# EAGLE board Schemat termometru sWERSJA KOLEJNAAAAA DOSKONALA 4 (EAGLE 9.4.1)
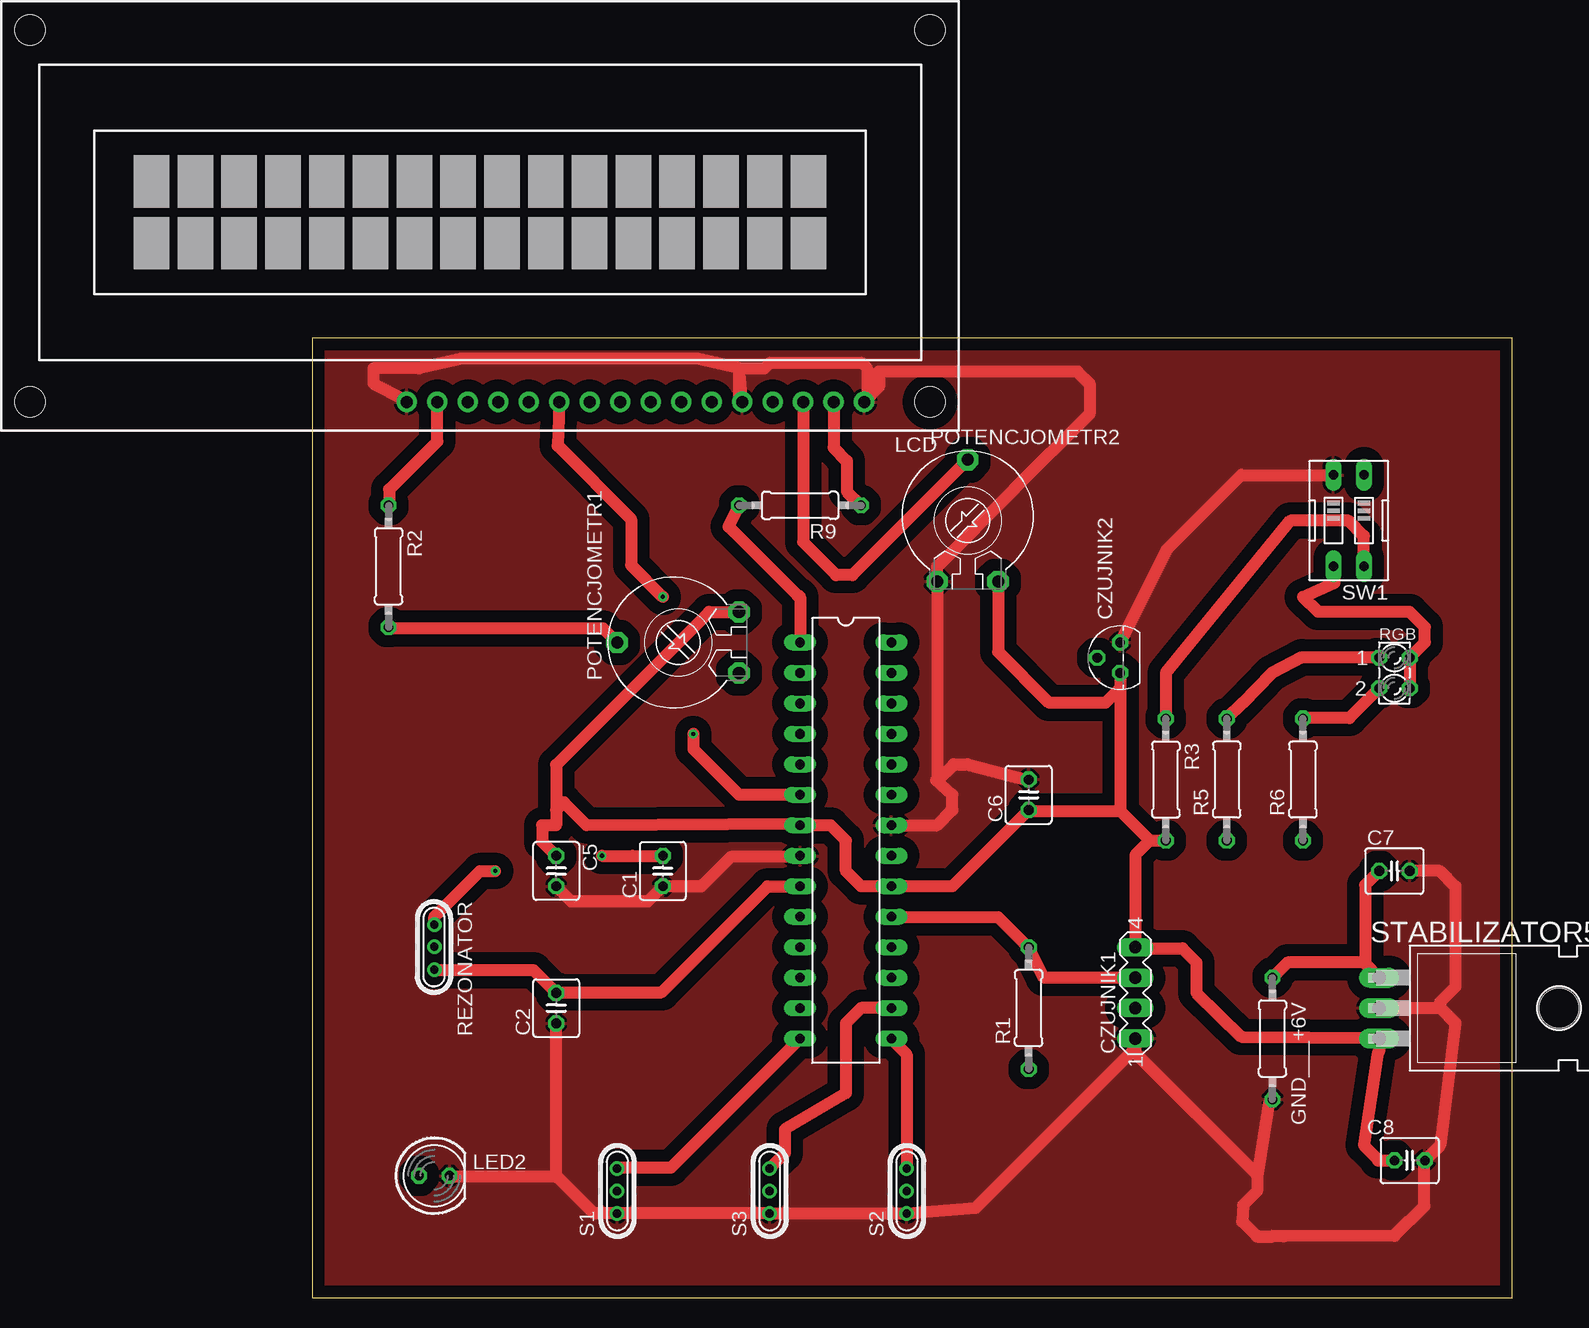
[diagram p0: board, top side]
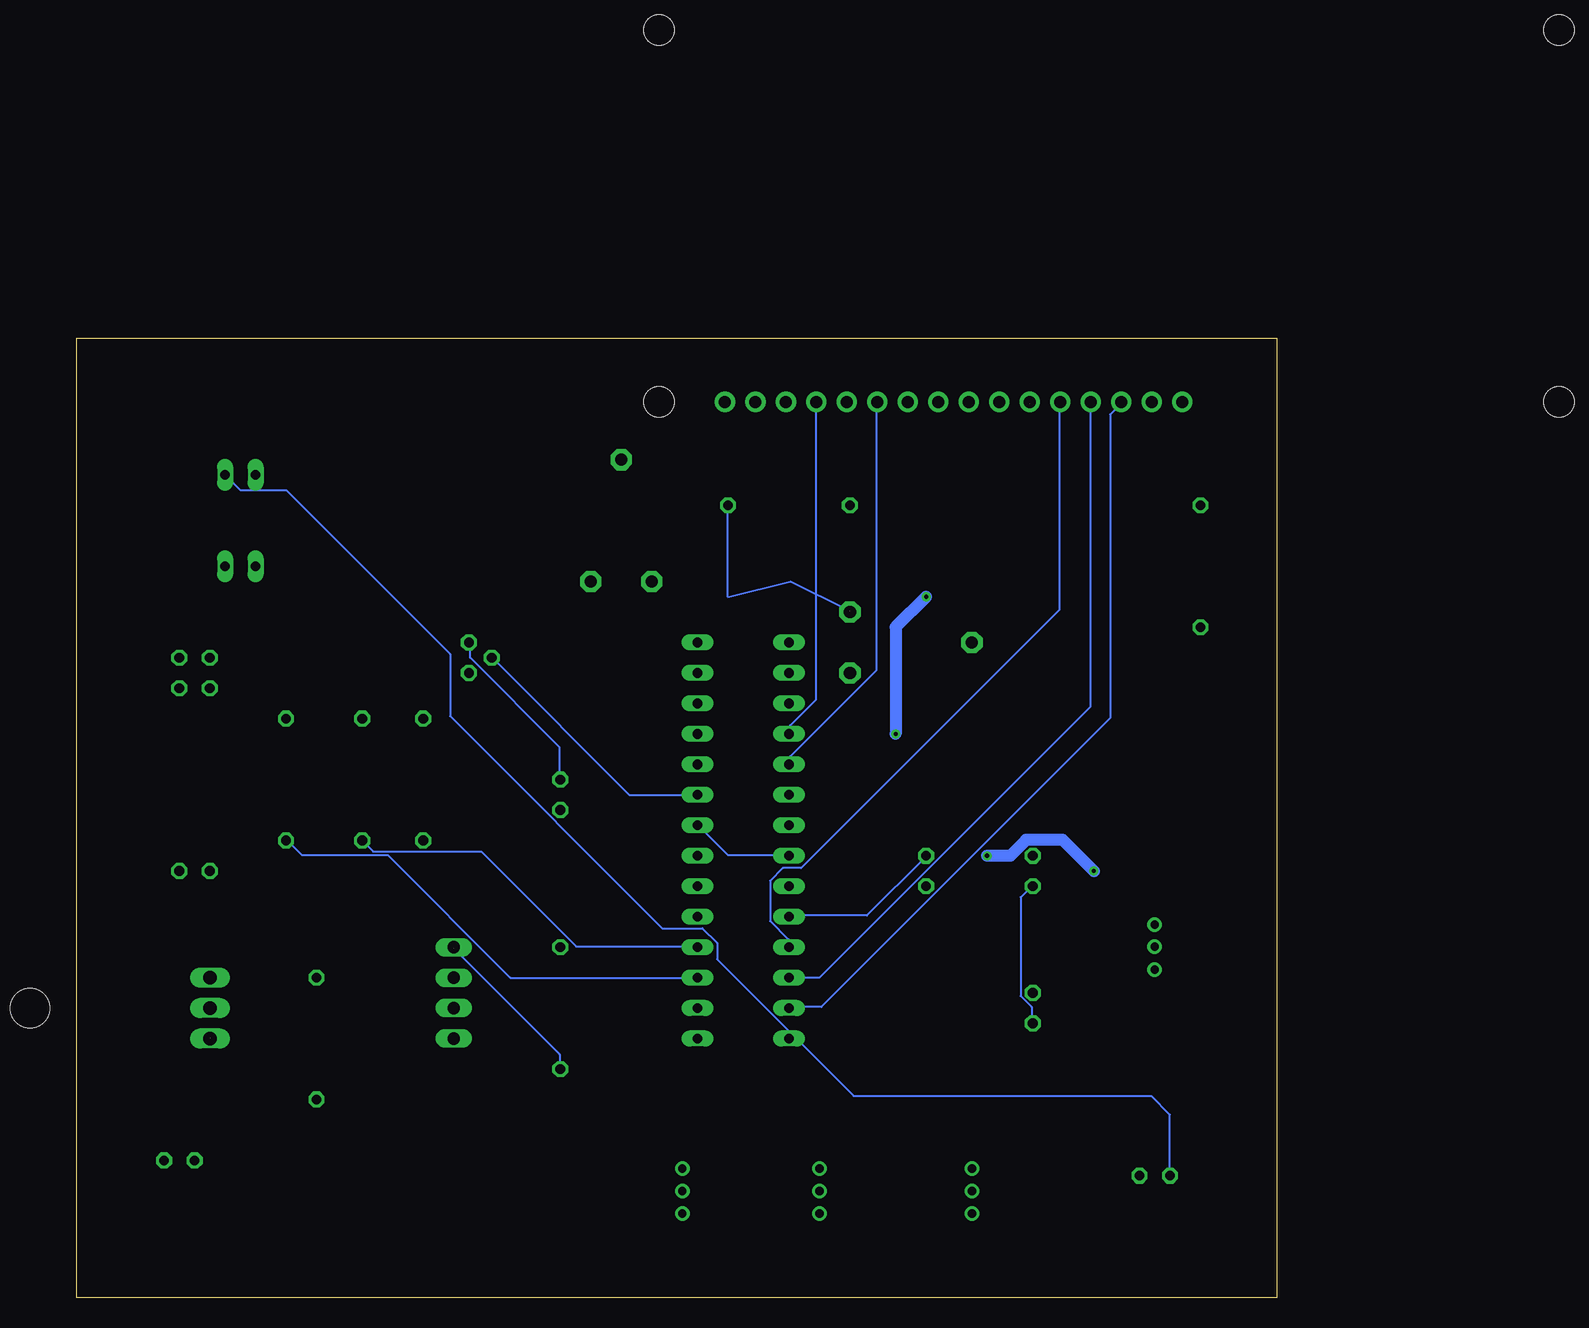
[diagram p1: board, bottom side, seen from below]

Size 100 x 80 mm. Coordinates in mm from the lower left corner, seen from the top.
Outline: 0,0 100,0 100,80 0,80 0,0
Copper layers (1*16): Top 0.035mm / dielectric 1.5mm / Bottom 0.035mm
Design rules "default": minimum track width 6mil, minimum drill 0.35mm, track to track 6mil, track to pad 6mil, pad to pad 6mil, via to via 6mil, smd to smd 6mil, copper to edge 40mil, drill to drill 6mil, minimum pad ring 10mil, minimum via ring 8mil, stop-mask expansion 4mil, vias tented up to drill 0mil, thermal gap 10mil

## Footprints (pad centres in the part's own frame; a part is rotated, then mirrored left to right if it is on the bottom)
C025-040X050 = drill 0.813 octagon: 1 -1.27,0; 2 1.27,0
MA04-1 = drill 1.016 long: 1 -3.81,0; 2 -1.27,0; 3 1.27,0; 4 3.81,0
TO92 = drill 0.813 octagon: 1 1.27,0; 2 0,1.905; 3 -1.27,0
0207/10 = drill 0.813 octagon: 1 -5.08,0; 2 5.08,0
DIL28-3 = drill 0.813 long: 1 -16.51,-3.81; 2 -13.97,-3.81; 3 -11.43,-3.81; 4 -8.89,-3.81; 5 -6.35,-3.81; 6 -3.81,-3.81; 7 -1.27,-3.81; 8 1.27,-3.81; 9 3.81,-3.81; 10 6.35,-3.81; 11 8.89,-3.81; 12 11.43,-3.81; 13 13.97,-3.81; 14 16.51,-3.81; 15 16.51,3.81; 16 13.97,3.81; 17 11.43,3.81; 18 8.89,3.81; 19 6.35,3.81; 20 3.81,3.81; 21 1.27,3.81; 22 -1.27,3.81; 23 -3.81,3.81; 24 -6.35,3.81; 25 -8.89,3.81; 26 -11.43,3.81; 27 -13.97,3.81; 28 -16.51,3.81
TUXGR_16X2_R2 = drill 1 pad 1.676: 1 -32,15.5; 2 -29.46,15.5; 3 -26.92,15.5; 4 -24.38,15.5; 5 -21.84,15.5; 6 -19.3,15.5; 7 -16.76,15.5; 8 -14.22,15.5; 9 -11.68,15.5; 10 -9.14,15.5; 11 -6.6,15.5; 12 -4.06,15.5; 13 -1.52,15.5; 14 1.02,15.5; 15 3.56,15.5; 16 6.1,15.5 | hole 2.5: -37.5,-15.5; 37.5,-15.5; -37.5,15.5; 37.5,15.5
LED5MM = drill 0.813 octagon: A -1.27,0; K 1.27,0
PT-10 = drill 1.016 pad 1.778 octagon: 1 -2.54,-5.08; 2 2.54,-5.08; 3 0,5.08
UM1 = drill 0.7 pad 1.2: 1 -1.875,0; 2 -0.027,0; 3 1.875,0
LZR182 = drill 0.813 octagon: A1 -1.27,1.27; A2 -1.27,-1.27; K1 1.27,1.27; K2 1.27,-1.27
TO220H = drill 1.118 long: 1 -2.54,-10.16; 2 0,-10.16; 3 2.54,-10.16 | hole 3.302: 0,4.826
EDG-02 = drill 0.813 long: 1 -1.27,-3.81; 2 1.27,-3.81; 3 1.27,3.81; 4 -1.27,3.81

## Placement (x,y rotation side)
C1  [C025-040X050]  29.21,35.56 90 top
C2  [C025-040X050]  20.32,24.13 90 top
C5  [C025-040X050]  20.32,35.56 270 top
C6  [C025-040X050]  59.69,41.91 90 top
C7  [C025-040X050]  90.17,35.56 0 top
C8  [C025-040X050]  91.44,11.43 0 top
CZUJNIK1  [MA04-1]  68.58,25.4 90 top
CZUJNIK2  BC238  [TO92]  67.31,53.34 90 top
GND___+6V  [0207/10]  80.01,21.59 270 top
IC1  MEGA8-P  [DIL28-3]  44.45,38.1 270 top
LCD  TUXGR_16X2_R2  [TUXGR_16X2_R2]  13.97,90.17 180 top
LED2  [LED5MM]  10.16,10.16 0 top
POTENCJOMETR1  [PT-10]  30.48,54.61 90 top
POTENCJOMETR2  [PT-10]  54.61,64.77 0 top
R1  [0207/10]  59.69,24.13 90 top
R2  [0207/10]  6.35,60.96 270 top
R3  [0207/10]  71.12,43.18 270 top
R5  [0207/10]  76.2,43.18 90 top
R6  [0207/10]  82.55,43.18 90 top
R9  [0207/10]  40.64,66.04 180 top
REZONATOR  16M20AUM1  [UM1]  10.16,29.21 270 top
RGB  LZR182  [LZR182]  90.17,52.07 0 top
S1  16M20AUM1  [UM1]  25.4,8.89 90 top
S2  16M20AUM1  [UM1]  49.53,8.89 90 top
S3  16M20AUM1  [UM1]  38.1,8.89 90 top
STABILIZATOR5V  7805T  [TO220H]  99.06,24.13 270 top
SW1  [EDG-02]  86.36,64.77 180 top

## Library data of the parts
C1 C2 C5-C8 = rcl; SPICEPREFIX: C
CZUJNIK1 = con-lstb; OC_FARNELL: unknown; OC_NEWARK: unknown
CZUJNIK2 = transistor-neu-to92
GND___+6V R1-R3 R5 R6 R9 = rcl; SPICEPREFIX: R
IC1 = atmel; OC_FARNELL: unknown; OC_NEWARK: unknown
LCD = display-lcd; OC_FARNELL: unknown; OC_NEWARK: unknown
LED2 RGB = led
POTENCJOMETR1 POTENCJOMETR2 = rcl; SPICEMODEL: POT; SPICEPREFIX: X
REZONATOR S1-S3 = crystal; OC_FARNELL: unknown; OC_NEWARK: unknown
STABILIZATOR5V = linear
SW1 = special

## Nets
DIPSWITCH: RGB.K1 RGB.K2 SW1.3
GND: C1.1 C2.1 C5.2 C6.2 C7.2 C8.2 CZUJNIK1.1 CZUJNIK2.1 GND___+6V.2 IC1.8 IC1.22 LCD.1 LCD.5 LCD.16 LED2.K POTENCJOMETR2.1 S1.1 S2.1 S3.1 STABILIZATOR5V.2 SW1.2
N$1: R3.1 SW1.4
N$2: IC1.18 R5.1
N$3: R5.2 RGB.A1
N$4: CZUJNIK2.2 IC1.23
N$5: CZUJNIK1.3 IC1.19 R1.2
N$6: IC1.16 S3.3
N$7: IC1.15 S2.3
N$8: IC1.14 S1.3
N$9: POTENCJOMETR1.3 R2.2
N$10: LED2.A SW1.1
N$11: LCD.15 R2.1
N$12: IC1.17 R6.1
N$13: LCD.3 POTENCJOMETR2.3
N$14: R6.2 RGB.A2
N$15: C2.2 IC1.9 REZONATOR.3
N$16: IC1.4 LCD.4
N$17: C1.2 IC1.10 REZONATOR.1
N$18: C5.1 C6.1 C8.1 CZUJNIK1.4 CZUJNIK2.3 IC1.7 IC1.20 LCD.2 POTENCJOMETR1.2 POTENCJOMETR2.2 R1.1 R3.2 R9.1 STABILIZATOR5V.3
N$20: IC1.1 R9.2
N$21: IC1.5 LCD.6
N$22: IC1.13 LCD.14
N$23: IC1.12 LCD.13
N$24: IC1.11 LCD.12
N$25: IC1.6 LCD.11
N$26: C7.1 GND___+6V.1 STABILIZATOR5V.1

## Tracks (layer width: path | path; a pad name or v marks a point on that pad's centre or on a via)
DIPSWITCH
  Top 0.152: 85.19,60.96 SW1.3
  Top 1.016: 85.19,60.96 85.19,59.59 82.55,58.42 83.82,57.15 91.44,57.15 92.71,55.88 92.71,54.61 RGB.K1 RGB.K2
GND
  Top 0.152: 78.69,10.26 GND___+6V.2 | 92.66,11.43 C8.2 | 25.45,7.01 S1.1 | S2.1 | S3.1 | 11.43,10.06 LED2.K | 35.66,74.68 LCD.5 35.83,74.69 | 51.97,43.13 52.12,43.13 | 59.59,43.13 C6.2 | 48.31,39.47 IC1.22 | 52.12,59.59 POTENCJOMETR2.1 | 40.54,36.73 IC1.8 | 20.27,22.86 C2.1
  Top 1.016: 93.98,24.13 93.98,24.64 95.25,25.91 95.25,34.29 93.98,35.56 C7.2 | STABILIZATOR5V.2 93.98,24.13 | 80.91,5.09 90.17,5.13 92.66,7.62 92.66,11.43 | 80.91,5.09 78.74,5.08 | 78.74,5.08 80.01,5.08 79.96,5.13 80.91,5.09 | 78.74,5.08 78.69,5.13 | 78.69,5.13 78.83,5.13 | 78.69,5.13 77.47,6.35 77.56,7.71 78.74,8.89 78.74,10.16 79.7,16.2 GND___+6V.2 | CZUJNIK1.1 68.63,20.32 78.69,10.26 | 93.98,24.13 95.25,22.86 93.98,12.7 C8.2 | 25.45,7.01 S3.1 S2.1 | 20.27,10.06 20.42,10.06 23.45,7.03 23.55,7.01 S1.1 | 20.27,10.06 11.43,10.06 | LCD.16 7.62,74.92 5.08,76.2 5.08,77.47 8.89,77.47 12.45,78.28 32.05,78.28 35.56,77.47 | 35.66,74.68 35.56,74.78 35.56,77.47 | 46.23,74.68 46.23,77.47 45.77,77.93 38.15,77.93 37.69,77.47 35.56,77.47 | LCD.5 35.56,77.47 | C5.2 21.59,33.02 27.94,33.02 C1.1 32.41,34.29 34.85,36.73 40.54,36.73 | 59.59,43.13 54.61,44.45 53.44,44.45 52.12,43.13 52.12,59.59 | 48.31,39.47 48.41,39.37 52.07,39.37 53.34,40.64 53.34,41.91 51.97,43.13 | SW1.2 77.42,68.58 71.17,62.33 CZUJNIK2.1 | POTENCJOMETR2.1 52.07,60.96 58.42,67.31 64.77,73.66 64.77,76.2 63.76,77.21 47.24,77.21 47.24,75.94 LCD.1 | 20.27,22.86 20.27,10.06 | 68.53,20.73 55.27,7.47 S2.1
  Bottom 0.152: C2.1 20.42,22.86 20.42,24.23 21.34,25.15 21.34,33.38 20.42,34.29 C5.2 | IC1.8 40.69,36.88 45.72,36.88 48.16,39.32 IC1.22 | CZUJNIK2.1 67.21,54.56 67.21,53.34 59.74,45.87 59.74,43.28 C6.2
  pour Top (isolate 1.016): 100.33,0 0,0 0,80.01 100.33,80.01
N$1
  Top 1.016: SW1.4 87.63,63.5 86.36,64.77 81.51,64.77 71.12,52.07 R3.1
N$2
  Bottom 0.152: R5.1 75.29,37.19 66.29,37.19 58.37,29.26 48.31,29.26 IC1.18
N$3
  Top 1.016: RGB.A1 82.45,53.34 82.5,53.39 79.96,52.07 77.47,49.53 R5.2
N$4
  Bottom 0.152: IC1.23 53.95,41.91 65.38,53.34 CZUJNIK2.2
N$5
  Top 0.152: 48.31,31.7 IC1.19 | 59.59,29.26 R1.2
  Top 1.016: CZUJNIK1.3 60.96,26.67 R1.2 | 48.31,31.7 57.15,31.7 59.59,29.26
N$6
  Top 0.152: 48.16,24.08 IC1.16
  Top 1.016: S3.3 39.37,12.04 39.37,14.02 44.45,17.03 44.45,22.86 45.72,24.13 48.11,24.13 48.16,24.08
N$7
  Top 0.152: 48.31,21.49 IC1.15
  Top 1.016: S2.3 49.53,20.27 48.31,21.49
N$8
  Top 0.152: 25.45,10.82 S1.3
  Top 1.016: 25.45,10.82 29.87,10.82 IC1.14
N$9
  Top 0.152: 6.4,55.78 R2.2
  Top 1.016: 6.4,55.78 24.23,55.78 POTENCJOMETR1.3
N$10
  Bottom 0.152: LED2.A 8.89,15.24 10.46,16.82 35.26,16.82 46.63,28.19 46.63,29.57 47.85,30.79 51.21,30.79 68.89,48.46 68.89,53.65 82.55,67.31 86.36,67.31 SW1.1
N$11
  Top 0.152: 6.4,66.14 R2.1
  Top 1.016: 6.4,66.14 6.4,67.36 10.41,71.37 LCD.15
N$12
  Bottom 0.152: IC1.17 63.86,26.67 74.07,36.88 81.23,36.88 82.45,38.1 R6.1
N$13
  Top 1.016: LCD.3 40.89,63 43.65,60.23 44.99,60.23 POTENCJOMETR2.3
N$14
  Top 0.152: 82.6,48.31 R6.2
  Top 1.016: 82.6,48.31 86.41,48.31 RGB.A2
N$15
  Top 0.152: 10.21,27.28 REZONATOR.3 | 20.42,25.45 C2.2
  Top 1.016: 10.21,27.28 18.44,27.28 C2.2 | IC1.9 37.95,34.29 29.11,25.45 20.42,25.45
N$16
  Bottom 0.152: IC1.4 40.54,47.09 40.54,47.7 38.41,49.84 38.41,74.52 LCD.4
N$17  (via drill 0.35)
  Top 0.152: 29.11,36.73 C1.2
  Top 1.016: C1.2 26.67,36.83 v24.13,36.83 | REZONATOR.1 10.16,31.75 13.97,35.56 v15.24,35.56
  Bottom 0.152: IC1.10 40.54,31.85 34.14,31.85 29.26,36.73 C1.2
  Bottom 1.016: v24.13,36.83 22.19,36.83 20.87,38.15 17.83,38.15 v15.24,35.56
N$18  (3 unrouted)
  Top 0.152: 35.56,57.25 POTENCJOMETR1.2 | 59.74,40.54 C6.1 | 67.36,51.97 CZUJNIK2.3 | 40.54,39.47 IC1.7
  Top 1.016: 20.32,40.64 20.32,44.4 33.07,57.15 POTENCJOMETR1.2 | C5.1 19.15,38 19.15,39.37 20.32,39.37 20.32,40.64 | LCD.2 43.43,70.86 44.55,69.74 44.55,67.21 R9.1 | STABILIZATOR5V.3 88.9,20.52 88.8,20.42 87.63,12.7 88.8,11.53 88.8,11.43 C8.1 | 88.85,21.64 77.42,21.74 73.66,25.4 73.66,27.94 72.49,29.11 68.58,29.11 | IC1.7 43.18,39.37 44.45,38.1 44.45,35.56 45.72,34.29 IC1.20 53.34,34.29 C6.1 | 67.36,40.54 59.74,40.54 | 69.8,38.1 67.36,40.54 | 67.36,40.54 67.36,51.97 | POTENCJOMETR2.2 57.15,53.85 61.42,49.58 66.09,49.58 67.31,50.8 CZUJNIK2.3 | CZUJNIK1.4 68.58,36.88 69.8,38.1 | 69.8,38.1 R3.2 | 40.54,39.47 22.86,39.37 20.95,41.27 20.32,40.64
  Bottom 0.152: R9.1 45.72,58.42 40.53,59.68 35.56,57.25 | R1.1 59.74,19.05 59.74,20.27 68.58,29.11 CZUJNIK1.4 | 88.85,21.64 STABILIZATOR5V.3
N$20
  Top 0.152: 40.44,58.52 40.54,58.52
  Top 1.016: 40.44,58.52 34.69,64.27 R9.2 | IC1.1 40.64,58.42 40.54,58.52
N$21
  Bottom 0.152: IC1.5 40.54,44.5 40.54,45.11 33.38,52.27 33.38,74.52 LCD.6
N$22
  Bottom 0.152: IC1.13 40.54,24.23 37.95,24.23 13.87,48.31 13.87,73.61 12.95,74.52 LCD.14
N$23
  Bottom 0.152: IC1.12 38.1,26.67 15.54,49.23 15.54,74.52 LCD.13
N$24
  Bottom 0.152: IC1.11 40.69,29.26 40.69,29.87 42.22,31.39 42.22,34.75 41.15,35.81 39.62,35.81 18.14,57.3 18.14,74.52 LCD.12
N$25  (via drill 0.35)  (1 unrouted)
  Top 1.016: 20.57,74.52 20.43,71.01 26.56,64.88 26.56,61.07 v29.21,58.42 | IC1.6 35.56,41.91 31.75,45.72 v31.75,46.99
  Bottom 0.152: 20.57,74.52 LCD.11
  Bottom 1.016: v29.21,58.42 31.75,55.88 v31.75,46.99
N$26
  Top 1.016: GND___+6V.1 81.28,27.94 87.63,27.94 STABILIZATOR5V.1 87.73,27.84 87.73,34.39 C7.1